# EAGLE board 12VAttinyDischargeChecker (EAGLE 8.5.2)

Size 100.33 x 70 mm. Coordinates in mm from the lower left corner, seen from the top.
Outline: 0,69.85 0,0 100.33,0 100.33,69.85
Outline: 0,69.85 0,70
Outline: 0,69.85 100,69.85
Copper layers (1*16): Top 0.035mm / dielectric 1.5mm / Bottom 0.035mm
Design rules "default": minimum track width 10mil, minimum drill 24mil, track to track 8mil, track to pad 8mil, pad to pad 8mil, via to via 8mil, smd to smd 8mil, copper to edge 40mil, drill to drill 8mil, minimum pad ring 10mil, minimum via ring 8mil, stop-mask expansion 4mil, vias tented up to drill 0mil, thermal gap 10mil

## Footprints (pad centres in the part's own frame; a part is rotated, then mirrored left to right if it is on the bottom)
0204/7 = drill 0.813 octagon: 1 -3.81,0; 2 3.81,0
DIL08 = drill 0.813 long: 1 -3.81,-3.81; 2 -1.27,-3.81; 3 1.27,-3.81; 4 3.81,-3.81; 5 3.81,3.81; 6 1.27,3.81; 7 -1.27,3.81; 8 -3.81,3.81
MA04-1 = drill 1.016 long: 1 -3.81,0; 2 -1.27,0; 3 1.27,0; 4 3.81,0
TO92- = drill 0.813 long: 1 2.54,0; 2 0,0; 3 -2.54,0
1X01/90 = drill 1.016 long: 1 -1.27,-3.81
E5-8,5 = drill 1.016 pad 2.54: + -2.54,0 | drill 1.016 pad 2.54 octagon: - 2.54,0
P1-17Y = drill 1.702 pad 2.121 long: TP 0,0
MA06-1 = drill 1.016 long: 1 -6.35,0; 2 -3.81,0; 3 -1.27,0; 4 1.27,0; 5 3.81,0; 6 6.35,0
W237-132 = drill 1.194 long: 1 -2.54,-0.635; 2 2.54,-0.635
RS-2,5 = drill 0.813 pad 1.6 octagon: 1 -1.27,0; 2 1.27,0
2X02/90 = drill 1.016 octagon: 1 -1.27,-6.35; 2 -1.27,-3.81; 3 1.27,-6.35; 4 1.27,-3.81
PAK100/2500-10 = drill 1 pad 1.422: 1 -5.08,-1.27; 2 -5.08,1.27; 3 -2.54,-1.27; 4 -2.54,1.27; 5 0,-1.27; 6 0,1.27; 7 2.54,-1.27; 8 2.54,1.27; 9 5.08,-1.27; 10 5.08,1.27

## Placement (x,y rotation side)
E$1  [0204/7]  8.89,20.32 180 top
E$2  [DIL08]  8.89,55.88 270 top
E$3  [DIL08]  25.4,55.88 270 top
E$4  [DIL08]  41.91,55.88 270 top
E$5  [DIL08]  58.42,55.88 270 top
E$6  [DIL08]  74.93,55.88 270 top
E$7  [DIL08]  91.44,55.88 270 top
E$8  [MA04-1]  15.24,55.88 90 top
E$9  [MA04-1]  2.54,55.88 90 top
E$10  [0204/7]  8.89,17.78 180 top
E$11  [0204/7]  25.4,20.32 180 top
E$12  [0204/7]  25.4,17.78 180 top
E$13  [0204/7]  41.91,17.78 180 top
E$14  [0204/7]  41.91,20.32 180 top
E$15  [0204/7]  58.42,17.78 180 top
E$16  [0204/7]  58.42,20.32 180 top
E$17  [0204/7]  113.03,25.4 90 top  (outside the outline)
E$18  [TO92-]  104.14,55.88 90 top  (outside the outline)
E$19  [0204/7]  74.93,17.78 180 top
E$20  [0204/7]  74.93,20.32 180 top
E$21  [0204/7]  91.44,17.78 180 top
E$22  [1X01/90]  112.39,40.01 180 top  (outside the outline)
E$23  [E5-8,5]  106.05,25.4 270 top  (outside the outline)
E$24  [P1-17Y]  27.94,66.04 0 top
E$25  [0204/7]  91.44,20.32 180 top
E$26  [MA04-1]  102.87,15.24 90 top
E$27  [MA04-1]  19.05,55.88 90 top
E$28  [MA06-1]  103.93,39.79 90 top  (outside the outline)
E$29  [W237-132]  105.73,66.04 180 top
E$30  [RS-2,5]  113.03,50.8 90 top  (outside the outline)
E$31  [2X02/90]  108.78,51.77 180 top  (outside the outline)
E$32  [MA04-1]  31.75,55.88 90 top
E$33  [MA04-1]  35.56,55.88 90 top
E$34  [MA04-1]  48.26,55.88 90 top
E$35  [MA04-1]  113.03,13.97 90 top  (outside the outline)
E$36  [MA04-1]  52.07,55.88 90 top
E$37  [MA04-1]  64.77,55.88 90 top
E$38  [MA04-1]  68.58,55.88 90 top
E$39  [MA04-1]  81.28,55.88 90 top
E$40  [MA04-1]  85.09,55.88 90 top
E$41  [MA04-1]  97.79,55.88 90 top
E$42  [P1-17Y]  11.43,66.04 0 top
E$43  [P1-17Y]  6.35,66.04 0 top
E$44  [P1-17Y]  107.95,39.37 0 top  (outside the outline)
E$45  [DIL08]  106.68,3.81 270 top
E$46  [MA06-1]  49.74,37.25 180 top
E$47  [P1-17Y]  22.86,66.04 0 top
E$48  [P1-17Y]  44.45,66.04 0 top
E$49  [P1-17Y]  39.37,66.04 0 top
E$50  [P1-17Y]  60.96,66.04 0 top
E$51  [P1-17Y]  55.88,66.04 0 top
E$52  [P1-17Y]  77.47,66.04 0 top
E$53  [P1-17Y]  72.39,66.04 0 top
E$54  [P1-17Y]  93.98,66.04 0 top
E$55  [P1-17Y]  88.9,66.04 0 top
E$61  [PAK100/2500-10]  51.44,10.79 0 top

## Library data of the parts
E$1 E$10-E$17 E$19-E$21 E$25 = eagle-ltspice
E$2-E$7 E$45 = 74xx-us
E$8 E$9 E$26-E$28 E$32-E$41 E$46 = con-lstb
E$18 = transistor-fet
E$22 E$31 = pinhead
E$23 = ref-packages-longpad
E$24 E$42-E$44 E$47-E$55 = testpad
E$29 = con-wago-508
E$30 = discrete
E$61 = con-3m

## Nets
S$2: E$1.1 E$2.4 E$12.1 E$43.TP
S$3: E$2.5 E$46.6
S$4: E$1.2 E$8.3 E$10.2
S$5: E$11.2 E$12.2 E$32.3
S$7: E$2.8 E$42.TP
S$8: E$3.5 E$46.5
S$9: E$3.8 E$24.TP
S$10: E$4.5 E$46.4
S$11: E$5.5 E$46.3
S$12: E$4.8 E$48.TP
S$13: E$6.8 E$7.8 E$52.TP E$54.TP
S$14: E$6.5 E$46.2
S$15: E$5.8 E$50.TP
S$16: E$7.5 E$46.1
S$17: E$7.4 E$25.1 E$55.TP
S$18: E$10.1
S$19: E$4.7 E$13.2 E$14.2
S$20: E$5.7 E$15.2 E$16.2
S$21: E$6.7 E$19.2 E$20.2
S$22: E$7.7 E$21.2 E$25.2
S$23: E$3.4 E$11.1 E$13.1 E$47.TP
S$24: E$4.4 E$14.1 E$15.1 E$49.TP
S$25: E$5.4 E$16.1 E$19.1 E$51.TP
S$26: E$6.4 E$20.1 E$21.1 E$53.TP

## Tracks (layer width: path | path; a pad name or v marks a point on that pad's centre or on a via)
S$2  (3 unrouted)
S$3  (1 unrouted)
S$4  (2 unrouted)
S$5  (2 unrouted)
S$7  (1 unrouted)
S$8  (1 unrouted)
S$9  (1 unrouted)
S$10  (1 unrouted)
S$11  (1 unrouted)
S$12  (1 unrouted)
S$13  (3 unrouted)
S$14  (1 unrouted)
S$15  (1 unrouted)
S$16  (1 unrouted)
S$17  (2 unrouted)
S$19  (2 unrouted)
S$20  (2 unrouted)
S$21  (2 unrouted)
S$22  (2 unrouted)
S$23  (3 unrouted)
S$24  (3 unrouted)
S$25  (3 unrouted)
S$26  (3 unrouted)

## Text on the board
bTest: 5v | - | - | - | - | - | - | + | + | + | + | + | + | 70v | - | 56v | - | 42v | - | 28v | - | 14v | - | 0v | - | 84v | 70v | 56v | 42v | 28v | 14v